# EAGLE board shunt-smd-g2 (EAGLE 9.5.1)
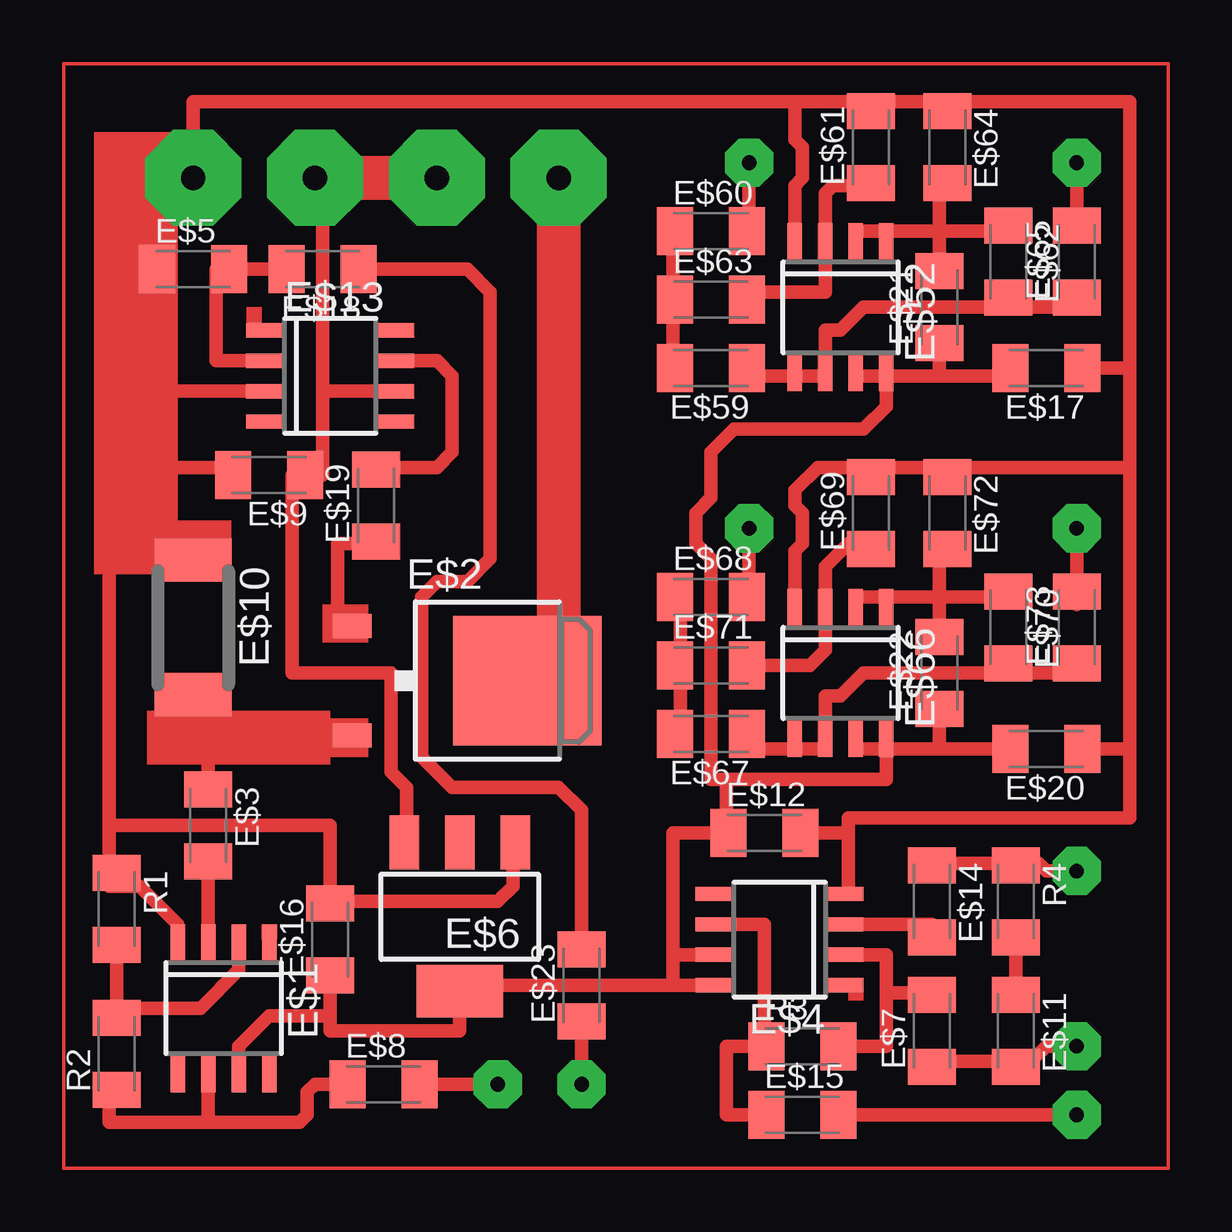
[diagram p0: board, top side]

No outline drawn. Coordinates in mm, seen from the top.
Copper layers (1*16): Top 0.035mm / dielectric 1.5mm / Bottom 0.035mm
Design rules "default": minimum track width 6mil, minimum drill 0.35mm, track to track 6mil, track to pad 6mil, pad to pad 6mil, via to via 6mil, smd to smd 6mil, copper to edge 40mil, drill to drill 6mil, minimum pad ring 10mil, minimum via ring 8mil, stop-mask expansion 4mil, vias tented up to drill 0mil, thermal gap 10mil

## Footprints (pad centres in the part's own frame; a part is rotated, then mirrored left to right if it is on the bottom)
SOIC8 = smd 0.6 x 1.5: 1 -1.905,-2.75; 2 -0.635,-2.75; 3 0.635,-2.75; 4 1.905,-2.75; 5 1.905,2.75; 6 0.635,2.75; 7 -0.635,2.75; 8 -1.905,2.75
TO252 = smd 1 x 1.6: 1 -2.28,-4.8; 2 2.28,-4.8 | smd 5.4 x 6.2: 3 0,2.5
C1206K = smd 1.5 x 2: 1 -1.5,0; 2 1.5,0
SOT223 = smd 1.219 x 2.235: 1 -2.311,-3.099; 2 0,-3.099; 3 2.311,-3.099 | smd 3.6 x 2.2: 4 0,3.099
R2512 = smd 1.8 x 3.2: 1 -2.8,0; 2 2.8,0

## Placement (x,y rotation side)
E$1  mcp601  [SOIC8]  45.4,14.29 180 top
E$2  AOD472  [TO252]  55.56,27.94 270 top
E$3  1k  [C1206K]  44.77,21.91 270 top
E$4  mcp601  [SOIC8]  68.58,17.14 90 top
E$5  15k  [C1206K]  44.13,45.09 0 top
E$6  1117  [SOT223]  55.24,18.1 180 top
E$7  1K  [C1206K]  74.93,13.34 90 top
E$8  1k  [C1206K]  52.07,11.11 0 top
E$9  1mk  [C1206K]  47.31,36.51 180 top
E$10  0.02R  [R2512]  44.13,30.16 270 top
E$11  31R  [C1206K]  78.42,13.34 270 top
E$12  1uF  [C1206K]  67.94,21.59 0 top
E$13  ir4427  [SOIC8]  49.85,40.64 270 top
E$14  1K  [C1206K]  74.93,18.73 270 top
E$15  1K  [C1206K]  69.53,9.84 0 top
E$16  1mf  [C1206K]  49.85,17.14 90 top
E$17  1uF  [C1206K]  79.69,40.96 180 top
E$18  1k  [C1206K]  49.53,45.09 180 top
E$19  1k  [C1206K]  51.75,35.24 90 top
E$20  1uF  [C1206K]  79.69,25.08 180 top
E$21  [C1206K]  75.25,43.5 90 top
E$22  [C1206K]  75.25,28.26 90 top
E$23  [C1206K]  60.33,15.24 90 top
E$52  mcp601  [SOIC8]  71.12,43.5 180 top
E$59  [C1206K]  65.72,40.96 180 top
E$60  [C1206K]  65.72,46.67 0 top
E$61  [C1206K]  72.39,50.16 90 top
E$62  [C1206K]  78.11,45.4 270 top
E$63  [C1206K]  65.72,43.81 0 top
E$64  [C1206K]  75.56,50.16 270 top
E$65  [C1206K]  80.96,45.4 90 top
E$66  mcp601  [SOIC8]  71.12,28.26 180 top
E$67  [C1206K]  65.72,25.72 180 top
E$68  [C1206K]  65.72,31.43 0 top
E$69  [C1206K]  72.39,34.92 90 top
E$70  [C1206K]  78.11,30.16 270 top
E$71  [C1206K]  65.72,28.57 0 top
E$72  [C1206K]  75.56,34.92 270 top
E$73  [C1206K]  80.96,30.16 90 top
R1  1k  [C1206K]  40.96,18.41 270 top
R2  22K  [C1206K]  40.96,12.38 90 top
R3  100K  [C1206K]  69.53,12.7 0 top
R4  31R  [C1206K]  78.42,18.73 270 top

## Library data of the parts
E$1 E$2 E$4 E$13 E$52 E$66 = linear
E$3 E$5 E$7-E$12 E$14-E$23 E$59-E$65 E$67-E$73 R1-R4 = rcl
E$6 = transistor-pnp

## Tracks (layer width: path | path; a pad name or v marks a point on that pad's centre or on a via)
S$1  (via drill 1.02 pad 4)
  Top 0.559: 69.22,21.59 71.44,21.59 | 71.44,21.59 71.44,22.23 83.19,22.23 83.19,25.08 | 71.44,21.59 71.44,19.05 71.12,19.05 | 83.19,25.08 83.19,36.83 | 83.19,36.83 83.19,40.96 | 83.19,40.96 83.19,52.07 69.22,52.07 | 83.19,36.83 70.17,36.83 69.22,35.88 69.22,35.24 69.53,34.92 69.53,33.66 69.22,33.34 69.22,30.8 | 69.22,52.07 44.13,52.07 v44.13,48.9 | 69.22,52.07 69.22,50.48 69.53,50.16 69.53,48.9 69.22,48.58 69.22,46.04 | 81.28,40.96 83.19,40.96 | 81.28,25.08 83.19,25.08
S$2
  Top 0.559: 50.48,11.11 49.21,11.11 48.9,10.79 48.9,9.84 48.58,9.53 44.77,9.53 | 40.64,10.79 40.64,9.53 44.77,9.53 | 44.77,11.75 44.77,9.53
S$3
  Top 0.559: 46.04,36.83 42.55,36.83
S$4
  Top 0.559: 47.94,45.09 45.09,45.09 45.09,41.27 47.31,41.27
S$5
  Top 0.559: 78.42,17.14 78.42,14.92
S$6
  Top 0.559: 65.72,17.78 67.94,17.78 67.94,12.7 66.36,12.7 66.36,9.84 67.94,9.84
S$7
  Top 0.152: 84.77,53.66 84.77,7.62 38.73,7.62 38.73,53.66 84.77,53.66
S$8
  Top 0.559: 47.31,40.01 42.86,40.01
S$9
  Top 0.559: 50.16,30.16 50.16,33.66 51.75,33.66
S$10
  Top 0.559: 44.77,23.18 44.77,25.72 | 44.77,25.72 44.77,27.3 | 50.8,25.72 44.77,25.72
S$11
  Top 0.559: 46.04,17.14 46.04,15.88 44.45,14.29 40.96,14.29 40.96,16.51
S$12
  Top 0.559: 53.34,11.11 56.83,11.11
S$14  (via drill 0.61 pad 2.01)
  Top 0.559: 67.31,46.67 v67.31,49.53
S$16
  Top 0.559: 71.12,12.7 73.03,12.7 73.03,14.92 | 73.03,14.92 73.03,16.51 71.44,16.51 | 73.03,14.92 74.61,14.92
S$17  (via drill 0.61 pad 2.01)
  Top 0.559: 60.33,13.34 v60.33,11.11
S$18
  Top 0.559: 44.77,16.51 44.77,20.64
S$19  (via drill 1.02 pad 4)
  Top 0.559: v49.21,48.9 49.53,48.58 49.53,40.01 | 49.53,40.01 49.53,36.51 48.26,36.51 48.26,28.26 52.39,28.26 52.39,24.13 53.02,23.5 53.02,21.59 | 52.7,40.01 49.53,40.01
  Top 1.829: v49.21,48.9 54.29,48.9
S$20  (via drill 0.61 pad 2.01)
  Top 0.559: 71.12,9.84 v80.96,9.84
S$21
  Top 0.559: 71.75,30.8 71.75,31.43 75.25,31.43 | 75.25,31.43 75.25,33.66 | 75.25,29.53 75.25,31.43 | 78.11,31.43 75.25,31.43
S$22  (via drill 0.61 pad 2.01)
  Top 0.559: v67.31,34.29 67.31,31.43
S$23  (via drill 0.61 pad 2.01)
  Top 0.559: 74.93,20.32 79.38,20.32 79.69,20 v80.96,20
S$24  (via drill 0.61 pad 2.01)
  Top 0.559: 74.93,12.06 79.06,12.06 79.69,12.7 v80.96,12.7
S$25
  Top 0.559: 57.47,21.91 57.47,19.37 56.83,18.73 50.16,18.73 49.85,19.05 49.85,21.91 40.64,21.91 | 43.5,16.83 43.5,17.78 41.91,19.37 40.64,19.37 40.64,21.91 | 40.64,34.29 40.64,21.91
S$26
  Top 0.559: 71.12,17.78 74.93,17.78
S$27  (via drill 1.02 pad 4)
  other vias: 54.29,48.9
S$28
  Top 0.559: 51.75,36.83 54.29,36.83 54.93,37.47 54.93,40.64 54.29,41.27 52.39,41.27
S$31  (via drill 0.61 pad 2.01)
  other vias: 56.83,11.11
S$34
  Top 0.559: 51.12,45.09 55.56,45.09 56.52,44.13 56.52,33.02 55.56,32.07 54.29,32.07 53.66,31.43 53.66,24.77 54.93,23.5 59.37,23.5 60.33,22.54 60.33,16.83
S$40  (via drill 1.02 pad 4)
  Top 1.829: v59.37,48.9 59.37,28.26
S$87
  Top 0.559: 67.31,44.13 70.48,44.13 70.48,48.26 70.8,48.58 72.39,48.58
S$88
  Top 0.559: 71.75,46.04 71.75,46.67 75.25,46.67 | 75.25,46.67 78.11,46.67 | 75.25,45.09 75.25,46.67 | 75.25,48.58 75.25,46.67
S$89
  Top 0.559: 64.14,40.96 64.14,46.67
S$95
  Top 0.559: 71.75,40.96 71.75,40.64 73.03,40.64 | 73.03,40.64 73.03,40.96 | 73.03,40.64 73.03,39.37 72.07,38.42 66.67,38.42 65.72,37.47 65.72,35.56 65.09,34.92 65.09,33.66 65.72,33.02 65.72,23.81 66.36,23.81 | 71.75,25.72 71.75,25.08 73.03,25.08 | 73.03,25.72 73.03,25.08 | 73.03,25.08 73.03,23.81 66.36,23.81 | 64.14,16.51 64.14,21.59 66.36,21.59 66.36,23.81 | 66.04,16.51 64.14,16.51 | 64.14,16.51 64.14,15.24 | 64.14,15.24 66.04,15.24 | 46.04,11.43 46.04,12.7 47.31,13.97 49.85,13.97 | 64.14,15.24 55.24,15.24 55.24,13.34 49.85,13.34 49.85,13.97 | 78.11,40.64 75.25,40.64 | 75.25,40.64 73.03,40.64 | 75.25,40.64 75.25,41.91 | 78.11,25.08 75.25,25.08 | 75.25,25.08 73.03,25.08 | 49.85,13.97 49.85,15.56 | 75.25,26.67 75.25,25.08
S$98  (via drill 0.61 pad 2.01)
  Top 0.559: 80.96,46.67 v80.96,49.53
S$101
  Top 0.559: 80.96,43.5 72.07,43.5 71.12,42.55 70.48,42.55 70.48,40.64 69.22,40.64 | 69.22,40.64 69.22,40.96 | 66.99,40.64 69.22,40.64
S$102
  Top 0.559: 67.31,28.57 69.85,28.57 70.48,29.21 70.48,32.7 71.44,33.66 72.39,33.66
S$104
  Top 0.559: 64.45,25.72 64.45,31.75
S$109  (via drill 0.61 pad 2.01)
  Top 0.559: 80.96,31.11 v80.96,34.29
S$112
  Top 0.559: 80.96,28.26 72.07,28.26 71.12,27.3 70.48,27.3 70.48,25.08 69.22,25.08 | 69.22,25.08 69.22,25.72 | 66.99,25.08 69.22,25.08
(copper drawn outside any net)
  shapes: Top area x9

## Text on the board
tNames: in
tValues: in | out | in | out | +in | + | -in | out